# EAGLE board Battery_sim (EAGLE 5.11)
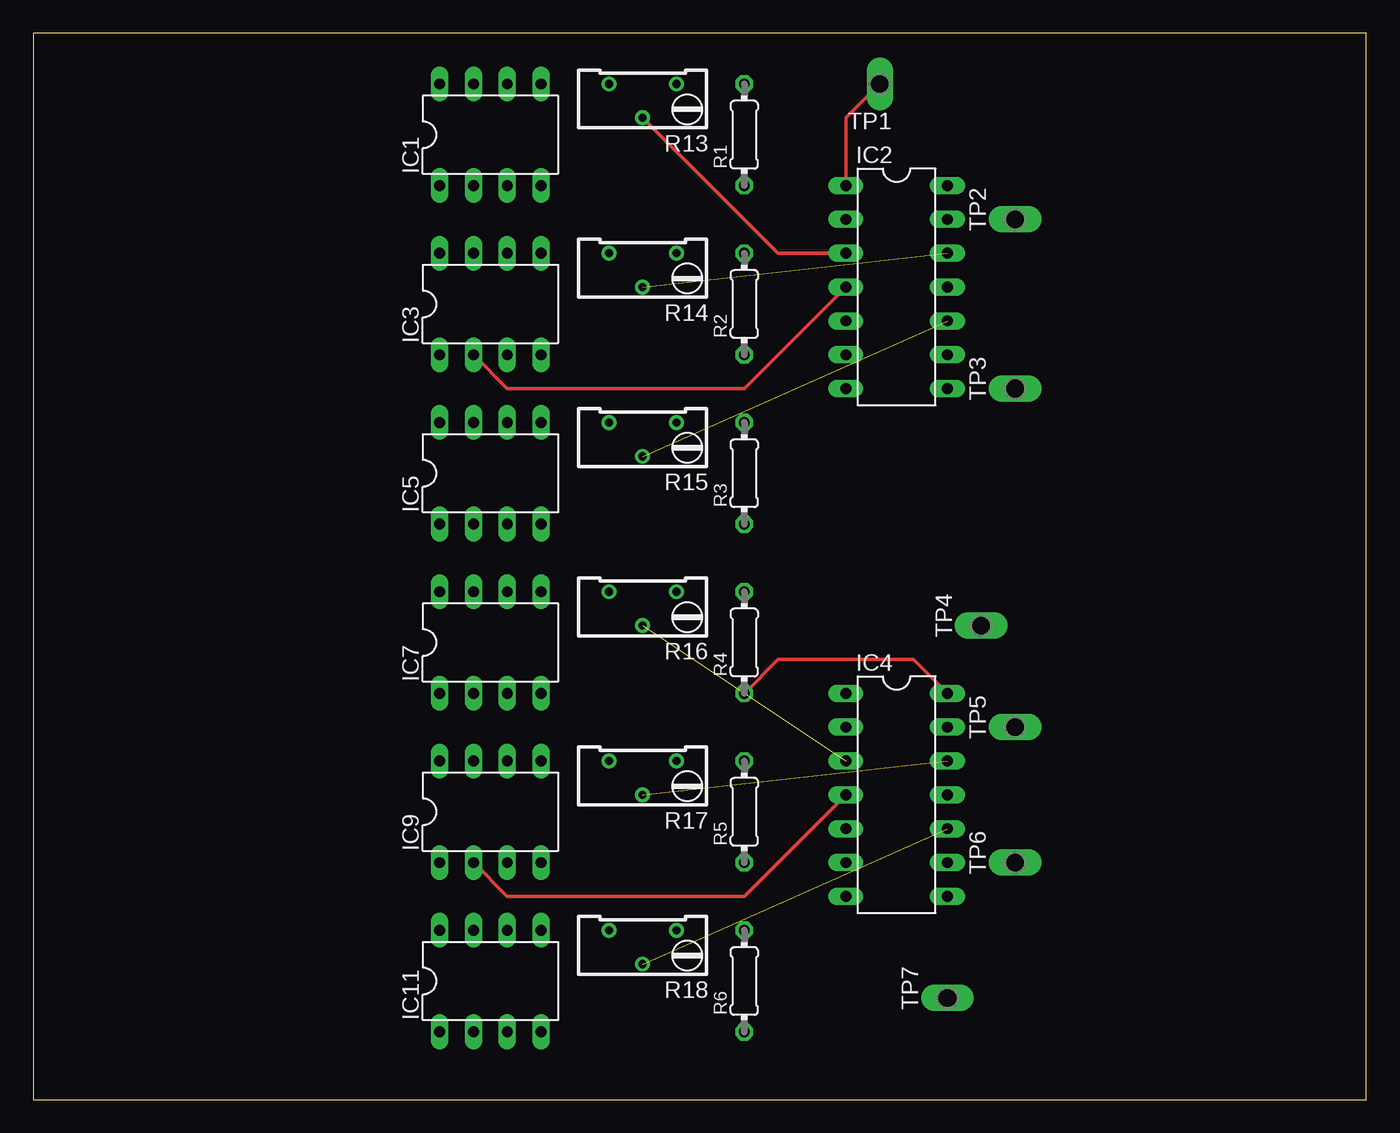
[diagram p0: board, top side]
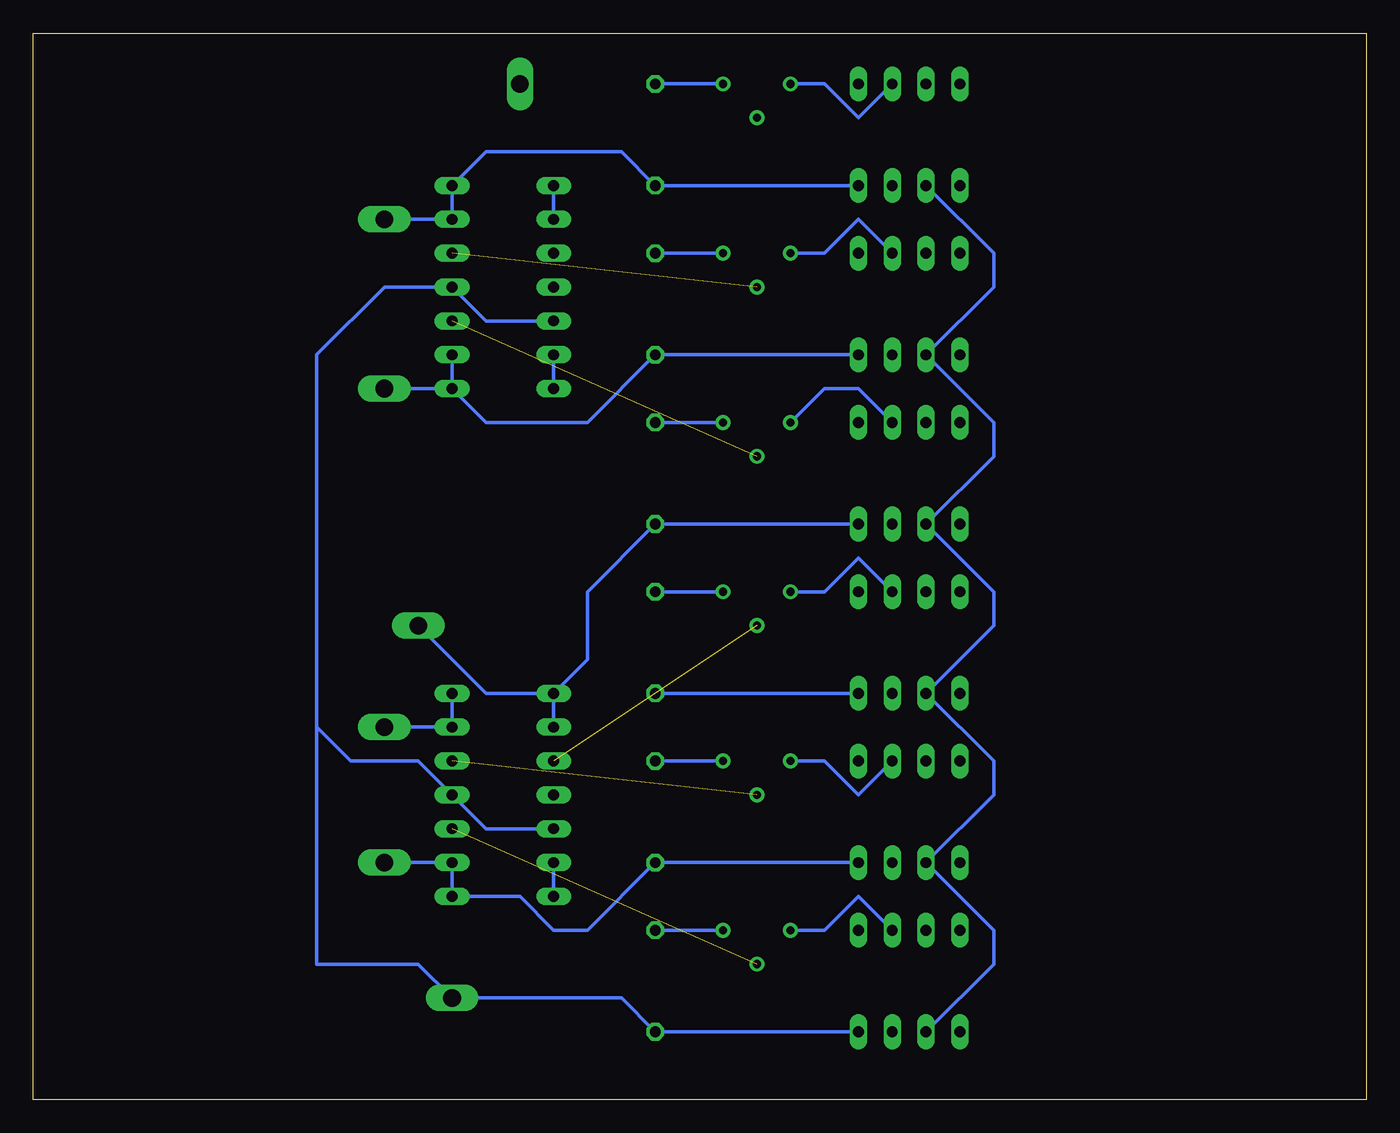
[diagram p1: board, bottom side, seen from below]

Size 100 x 80 mm. Coordinates in mm from the lower left corner, seen from the top.
Outline: 0,0 100,0 100,80 0,80 0,0
Copper layers (1*16): Top 0.035mm / dielectric 1.5mm / Bottom 0.035mm
Design rules "default": minimum track width 10mil, minimum drill 24mil, track to track 8mil, track to pad 8mil, pad to pad 8mil, via to via 8mil, smd to smd 8mil, copper to edge 40mil, drill to drill 8mil, minimum pad ring 10mil, minimum via ring 8mil, stop-mask expansion 4mil, vias tented up to drill 0mil, thermal gap 10mil

## Footprints (pad centres in the part's own frame; a part is rotated, then mirrored left to right if it is on the bottom)
DIL08 = drill 0.813 long: 1 -3.81,-3.81; 2 -1.27,-3.81; 3 1.27,-3.81; 4 3.81,-3.81; 5 3.81,3.81; 6 1.27,3.81; 7 -1.27,3.81; 8 -3.81,3.81
DIL14 = drill 0.813 long: 1 -7.62,-3.81; 2 -5.08,-3.81; 3 -2.54,-3.81; 4 0,-3.81; 5 2.54,-3.81; 6 5.08,-3.81; 7 7.62,-3.81; 8 7.62,3.81; 9 5.08,3.81; 10 2.54,3.81; 11 0,3.81; 12 -2.54,3.81; 13 -5.08,3.81; 14 -7.62,3.81
0204/7 = drill 0.813 octagon: 1 -3.81,0; 2 3.81,0
RTRIM64Y = drill 0.61 round: 1 0,-2.54; 2 -2.54,0; 3 0,2.54
P1-13Y = drill 1.321 pad 1.905 long: TP 0,0

## Placement (x,y rotation side)
IC1  LT1021N  [DIL08]  34.29,72.39 0 top
IC2  LM324N  [DIL14]  64.77,60.96 270 top
IC3  LT1021N  [DIL08]  34.29,59.69 0 top
IC4  LM324N  [DIL14]  64.77,22.86 270 top
IC5  LT1021N  [DIL08]  34.29,46.99 0 top
IC7  LT1021N  [DIL08]  34.29,34.29 0 top
IC9  LT1021N  [DIL08]  34.29,21.59 0 top
IC11  LT1021N  [DIL08]  34.29,8.89 0 top
R1  [0204/7]  53.34,72.39 90 top
R2  [0204/7]  53.34,59.69 90 top
R3  [0204/7]  53.34,46.99 90 top
R4  [0204/7]  53.34,34.29 90 top
R5  [0204/7]  53.34,21.59 90 top
R6  [0204/7]  53.34,8.89 90 top
R13  [RTRIM64Y]  45.72,76.2 90 top
R14  [RTRIM64Y]  45.72,63.5 90 top
R15  [RTRIM64Y]  45.72,50.8 90 top
R16  [RTRIM64Y]  45.72,38.1 90 top
R17  [RTRIM64Y]  45.72,25.4 90 top
R18  [RTRIM64Y]  45.72,12.7 90 top
TP1  PTR1PAD1-13Y  [P1-13Y]  63.5,76.2 180 top
TP2  PTR1PAD1-13Y  [P1-13Y]  73.66,66.04 90 top
TP3  PTR1PAD1-13Y  [P1-13Y]  73.66,53.34 90 top
TP4  PTR1PAD1-13Y  [P1-13Y]  71.12,35.56 90 top
TP5  PTR1PAD1-13Y  [P1-13Y]  73.66,27.94 90 top
TP6  PTR1PAD1-13Y  [P1-13Y]  73.66,17.78 90 top
TP7  PTR1PAD1-13Y  [P1-13Y]  68.58,7.62 90 top

## Library data of the parts
IC1 IC3 IC5 IC7 IC9 IC11 = linear-technology; MPN: LT1021BCN8-5#PBF; OC_FARNELL: 1273427; OC_NEWARK: 24M3927
IC2 IC4 = linear
R1-R6 = rcl
R13-R18 = resistor
TP1-TP7 = testpad

## Nets
0V: IC2.5 IC2.11 IC4.5 IC4.11 IC11.4 R6.1 TP7.TP
+24V: IC1.2 IC2.4 IC3.2 IC4.4 IC5.2 IC7.2 IC9.2 IC11.2
N$1: R1.2 R13.1
N$2: R2.2 R14.1
N$3: R3.2 R15.1
N$4: IC2.1 IC2.2 TP1.TP
N$5: IC1.6 R13.3
N$6: R4.2 R16.1
N$7: R5.2 R17.1
N$8: IC1.4 IC2.13 IC2.14 R1.1 TP2.TP
N$9: IC3.6 R14.3
N$10: R6.2 R18.1
N$11: IC2.3 R13.2
N$12: IC2.8 IC2.9 IC3.4 R2.1 TP3.TP
N$13: IC5.6 R15.3
N$14: IC2.12 R14.2
N$15: IC2.10 R15.2
N$16: IC4.1 IC4.2 IC5.4 R3.1 TP4.TP
N$17: IC7.6 R16.3
N$18: IC4.3 R16.2
N$19: IC4.8 IC4.9 IC9.4 R5.1 TP6.TP
N$20: IC4.12 R17.2
N$21: IC4.13 IC4.14 IC7.4 R4.1 TP5.TP
N$22: IC9.6 R17.3
N$23: IC4.10 R18.2
N$24: IC2.6 IC2.7
N$25: IC11.6 R18.3
N$26: IC4.6 IC4.7

## Tracks (layer width: path | path; a pad name or v marks a point on that pad's centre or on a via)
0V
  Bottom 0.254: IC4.5 66.04,20.32 IC4.11 71.12,25.4 76.2,25.4 78.74,27.94 | IC11.4 R6.1 55.88,7.62 TP7.TP 71.12,10.16 78.74,10.16 78.74,27.94 | IC2.5 66.04,58.42 IC2.11 73.66,60.96 78.74,55.88 78.74,27.94
+24V
  Top 0.254: IC9.2 35.56,15.24 53.34,15.24 IC4.4 | IC3.2 35.56,53.34 53.34,53.34 IC2.4
  Bottom 0.254: IC11.2 27.94,10.16 27.94,12.7 IC9.2 27.94,22.86 27.94,25.4 IC7.2 27.94,35.56 27.94,38.1 IC5.2 27.94,48.26 27.94,50.8 IC3.2 27.94,60.96 27.94,63.5 IC1.2
N$1
  Bottom 0.254: R13.1 R1.2
N$2
  Bottom 0.254: R14.1 R2.2
N$3
  Bottom 0.254: R15.1 R3.2
N$4
  Top 0.254: IC2.1 60.96,73.66 TP1.TP
  Bottom 0.254: IC2.2 IC2.1
N$5
  Bottom 0.254: R13.3 40.64,76.2 38.1,73.66 IC1.6
N$6
  Bottom 0.254: R16.1 R4.2
N$7
  Bottom 0.254: R17.1 R5.2
N$8
  Bottom 0.254: TP2.TP IC2.13 IC2.14 66.04,71.12 55.88,71.12 R1.1 IC1.4
N$9
  Bottom 0.254: R14.3 40.64,63.5 38.1,66.04 IC3.6
N$10
  Bottom 0.254: R18.1 R6.2
N$11
  Top 0.254: R13.2 55.88,63.5 IC2.3
N$12
  Bottom 0.254: IC2.8 IC2.9 | IC2.8 TP3.TP | IC3.4 R2.1 58.42,50.8 66.04,50.8 IC2.8
N$13
  Bottom 0.254: IC5.6 38.1,53.34 40.64,53.34 R15.3
N$14  (1 unrouted)
N$15  (1 unrouted)
N$16
  Bottom 0.254: IC5.4 R3.1 58.42,38.1 58.42,33.02 IC4.1 | IC4.1 IC4.2 | IC4.1 66.04,30.48 TP4.TP
N$17
  Bottom 0.254: R16.3 40.64,38.1 38.1,40.64 IC7.6
N$18  (1 unrouted)
N$19
  Bottom 0.254: TP6.TP IC4.9 IC4.8 63.5,15.24 60.96,12.7 58.42,12.7 R5.1 IC9.4
N$20  (1 unrouted)
N$21
  Top 0.254: R4.1 55.88,33.02 66.04,33.02 IC4.14
  Bottom 0.254: IC7.4 R4.1 | IC4.14 IC4.13 TP5.TP
N$22
  Bottom 0.254: R17.3 40.64,25.4 38.1,22.86 IC9.6
N$23  (1 unrouted)
N$24
  Bottom 0.254: IC2.7 IC2.6
N$25
  Bottom 0.254: R18.3 40.64,12.7 38.1,15.24 IC11.6
N$26
  Bottom 0.254: IC4.7 IC4.6